# Altium PCB som_fpga.PcbDoc (part 1 of 2)
Units mil, origin at the board's own origin, x right, y up, seen from the top; angles counter-clockwise.
Board outline 2362.2 x 1968.5 mil, 4 copper layers (F.Cu, In1.Cu, In2.Cu, B.Cu); 88 components, 289 nets, 794 pads, 250 vias.
Unrouted connection lines stored in the file: 96.
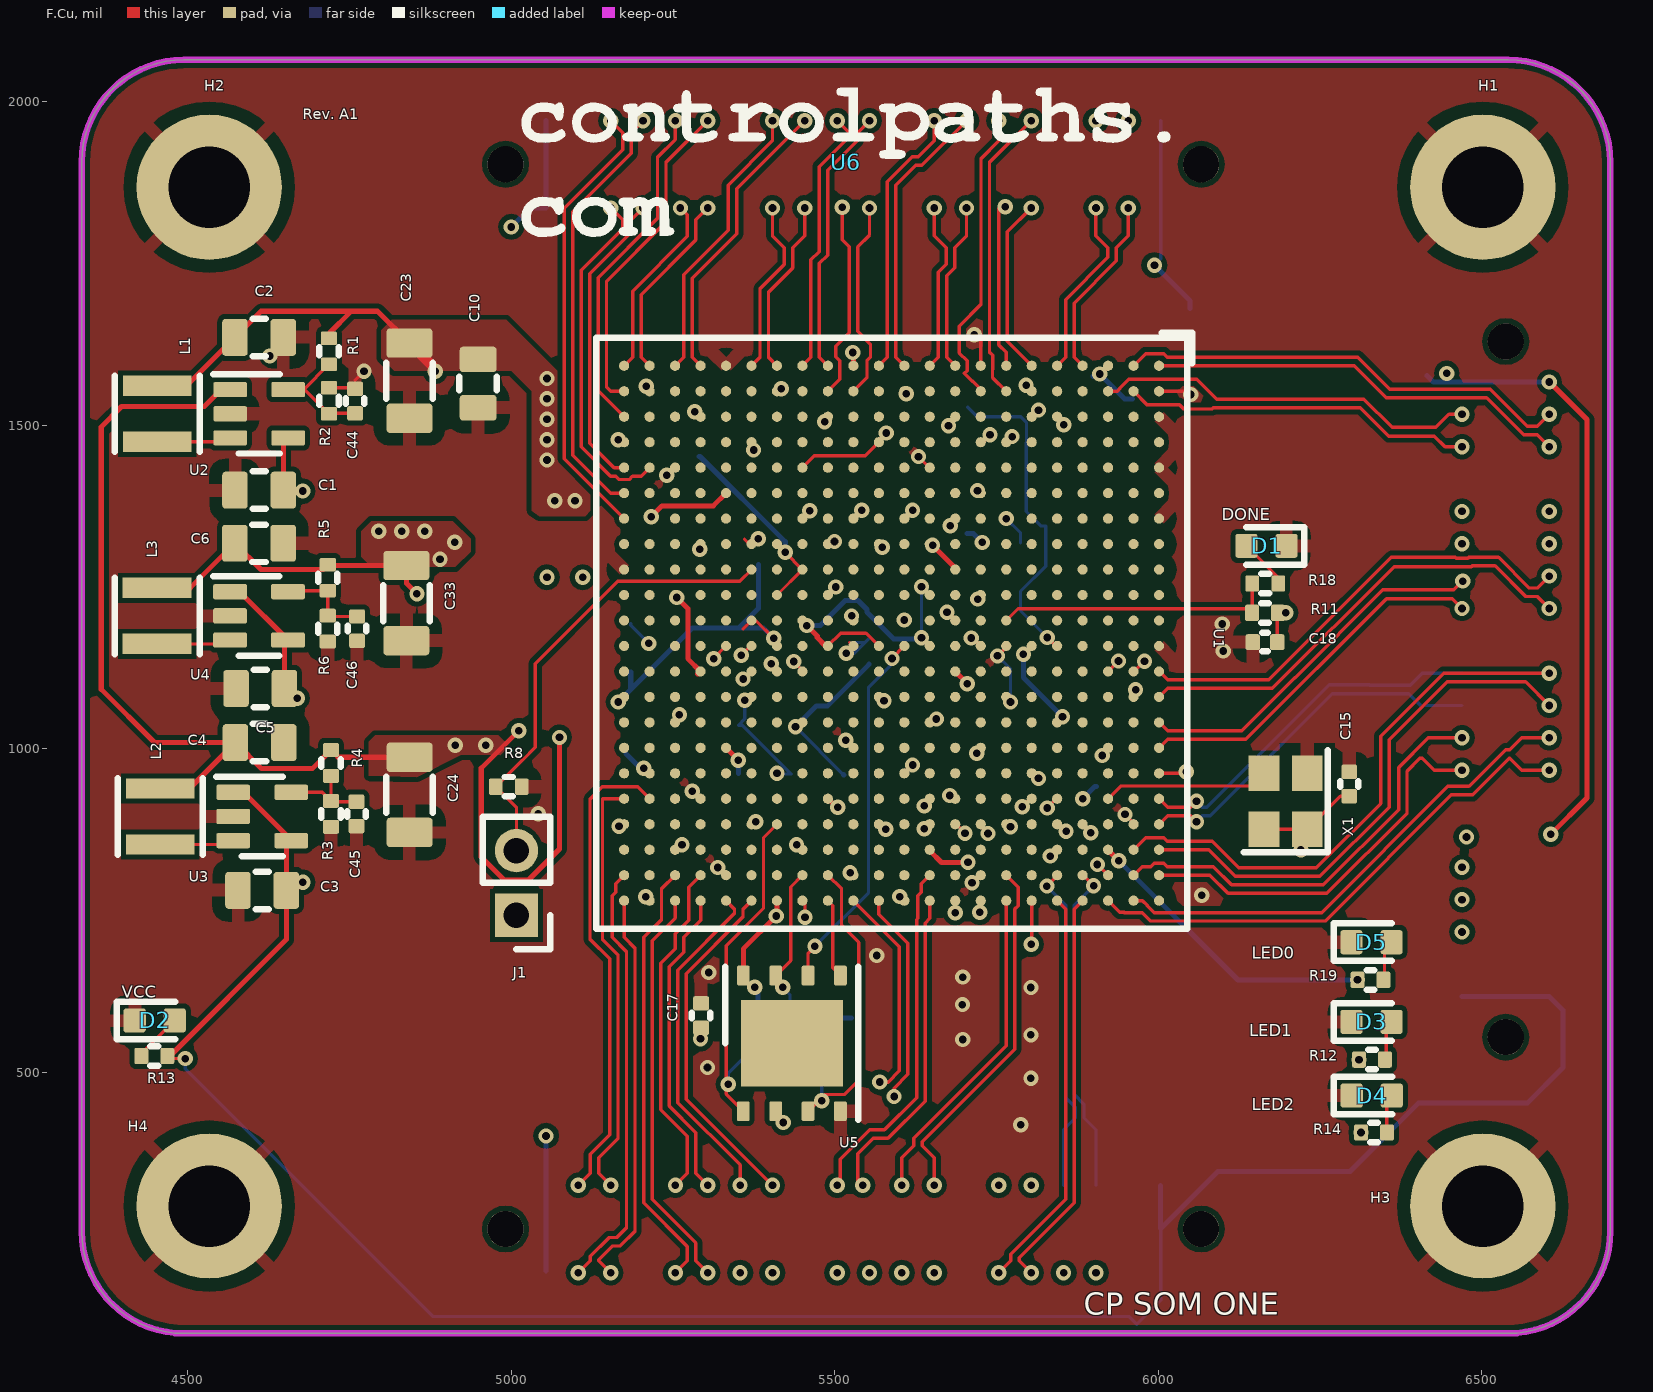
[diagram p0: F.Cu view]
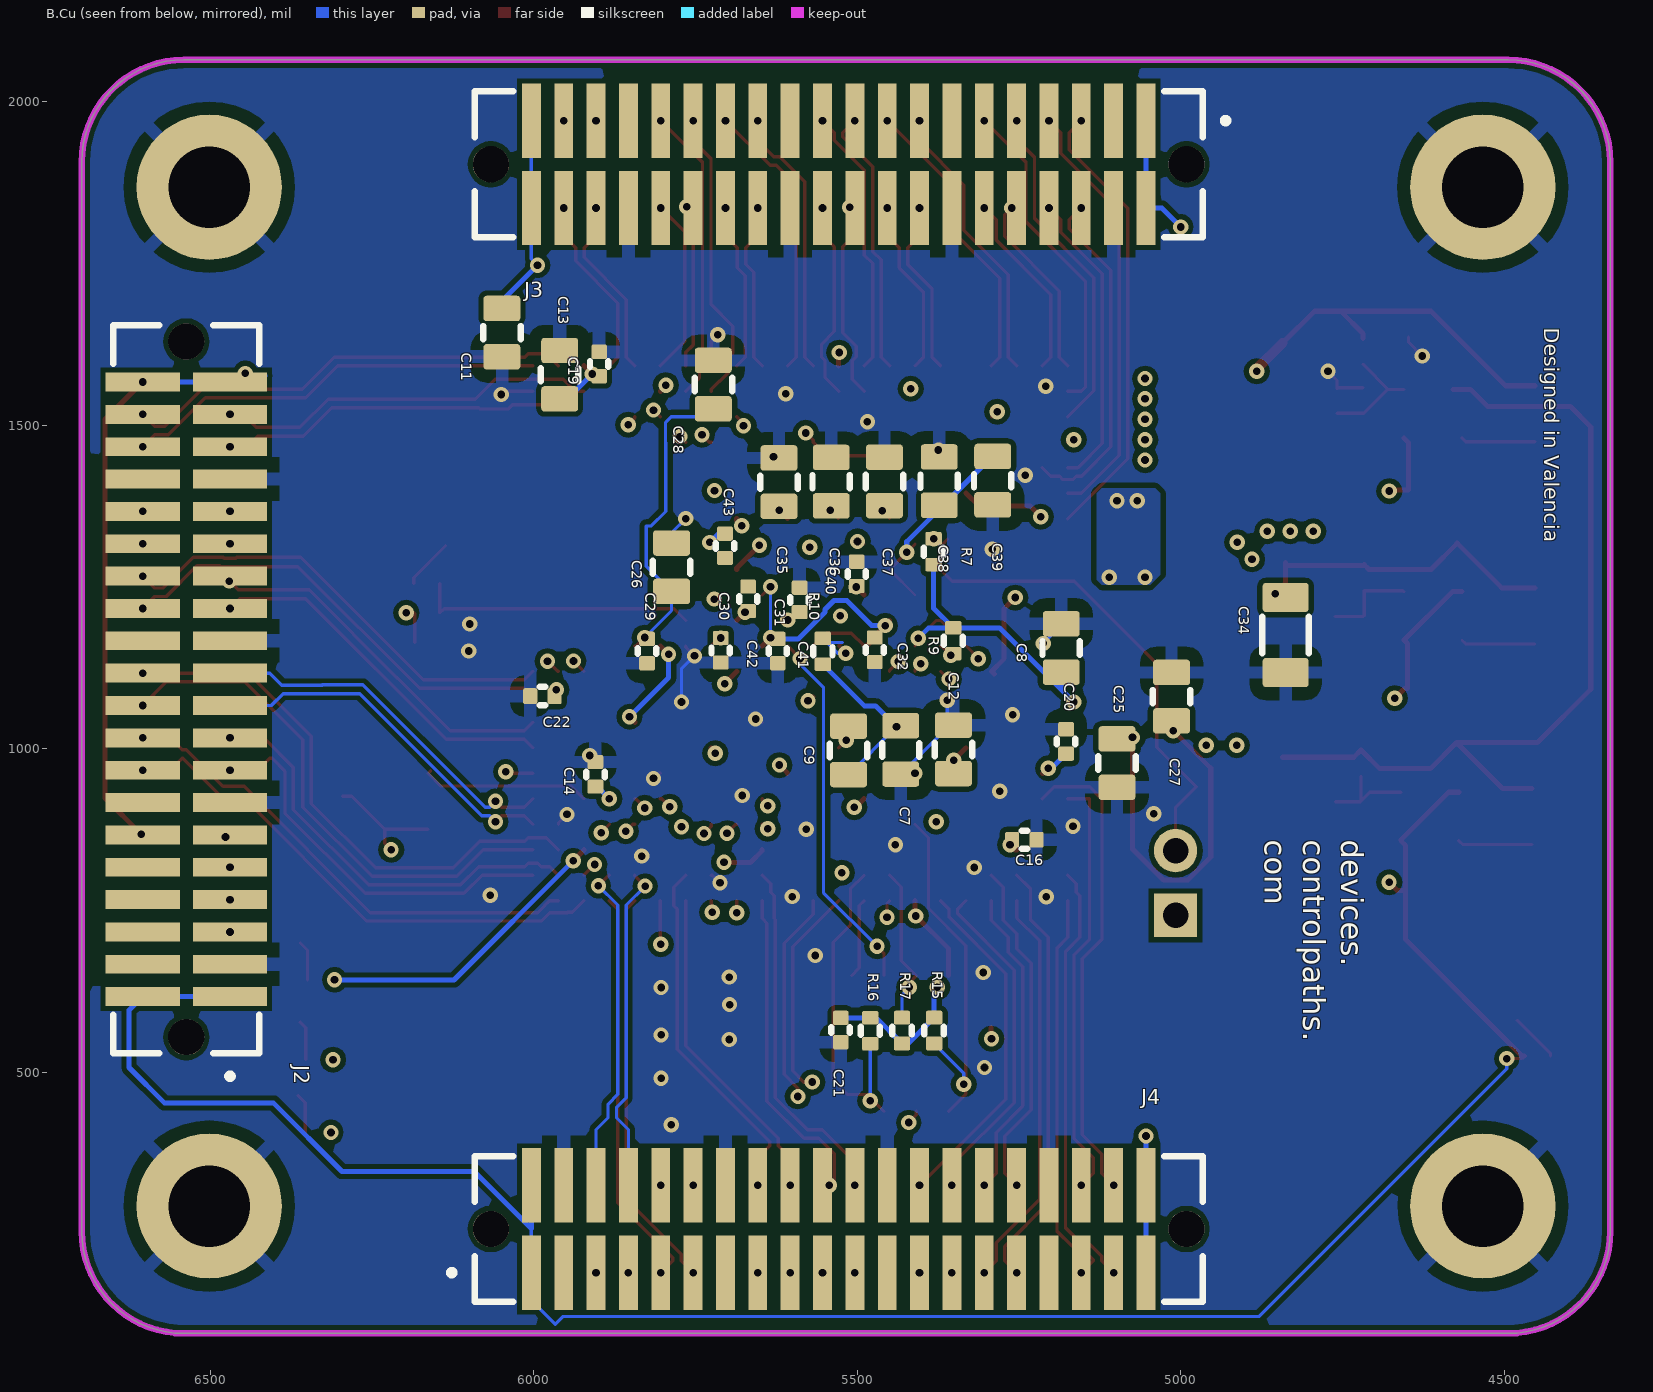
[diagram p1: B.Cu view, seen from below]
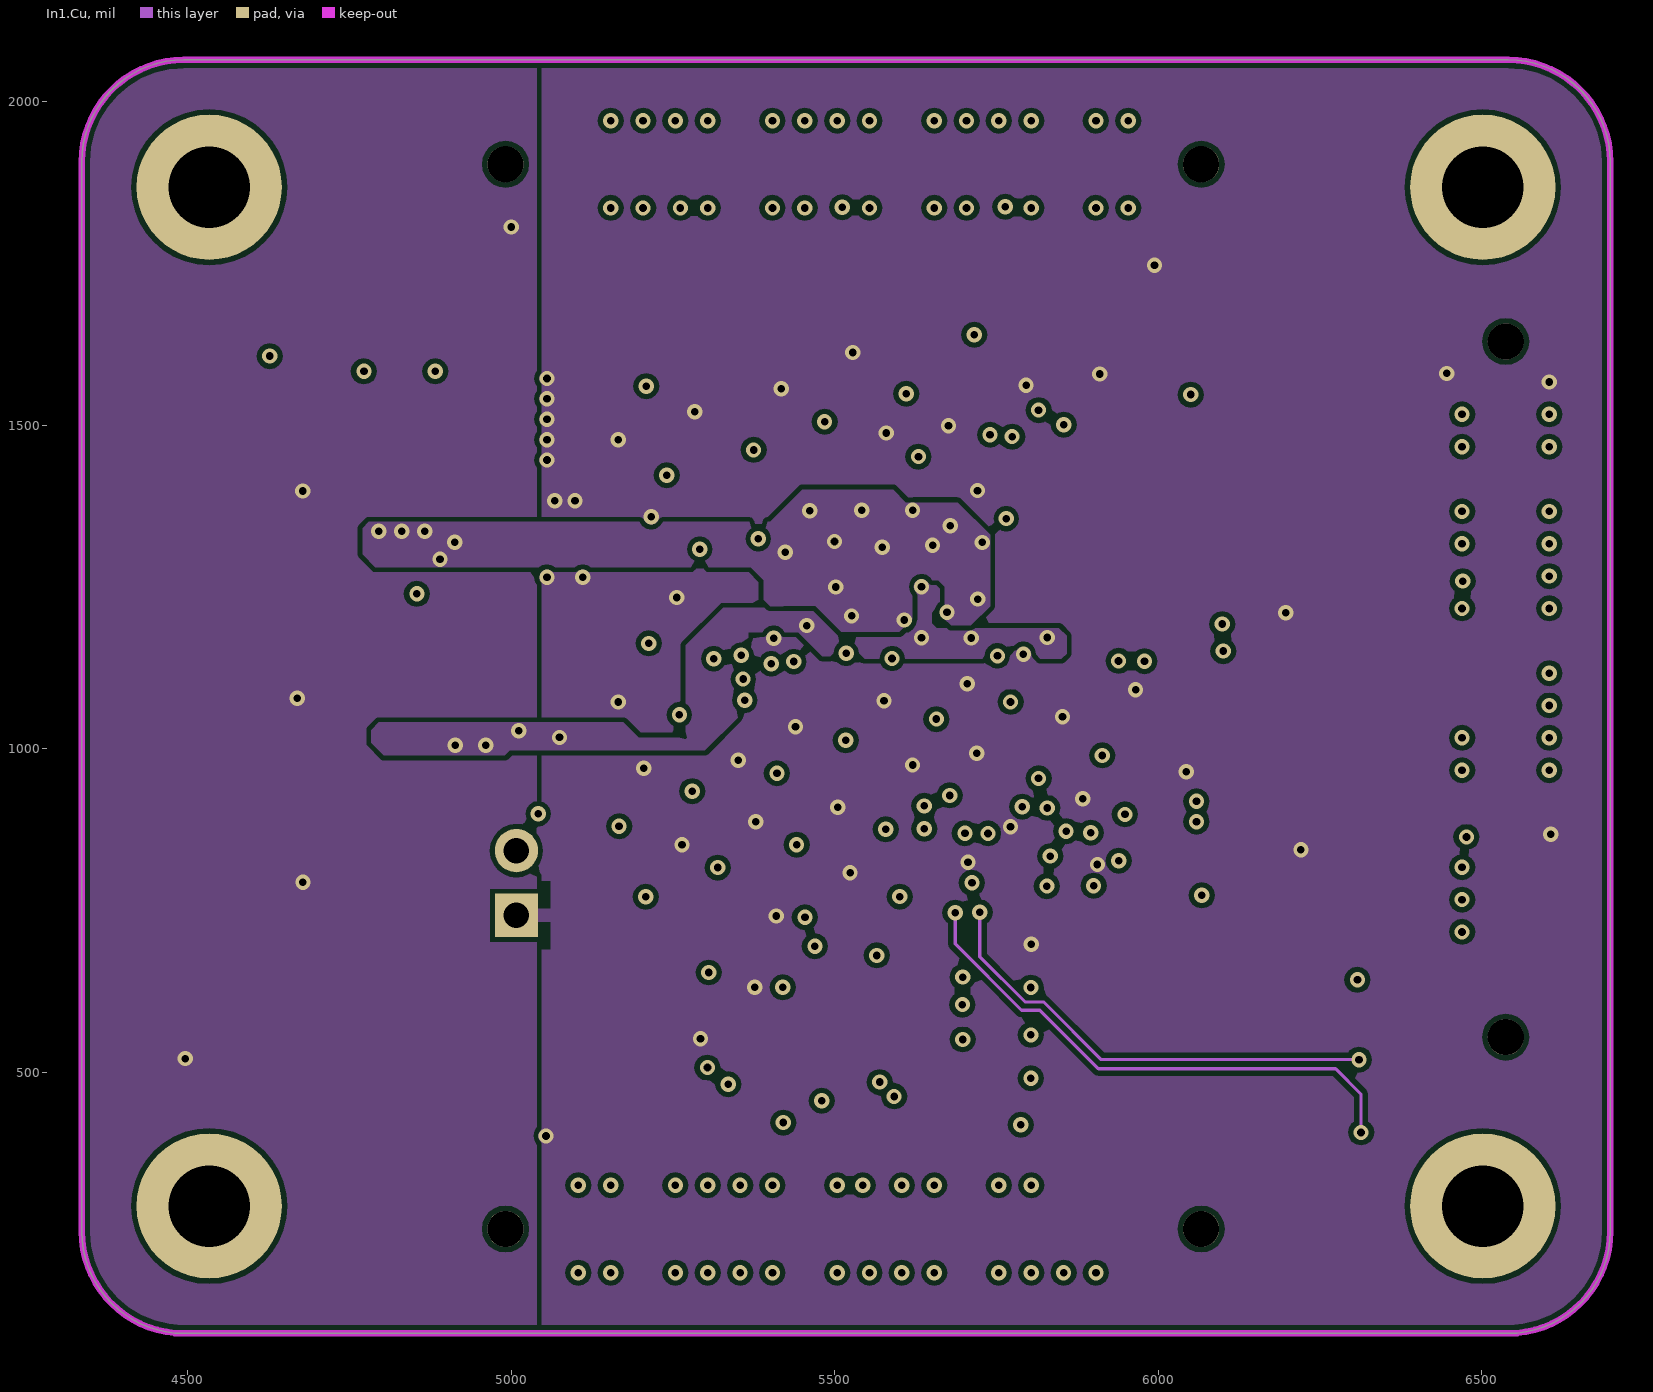
[diagram p2: In1.Cu]
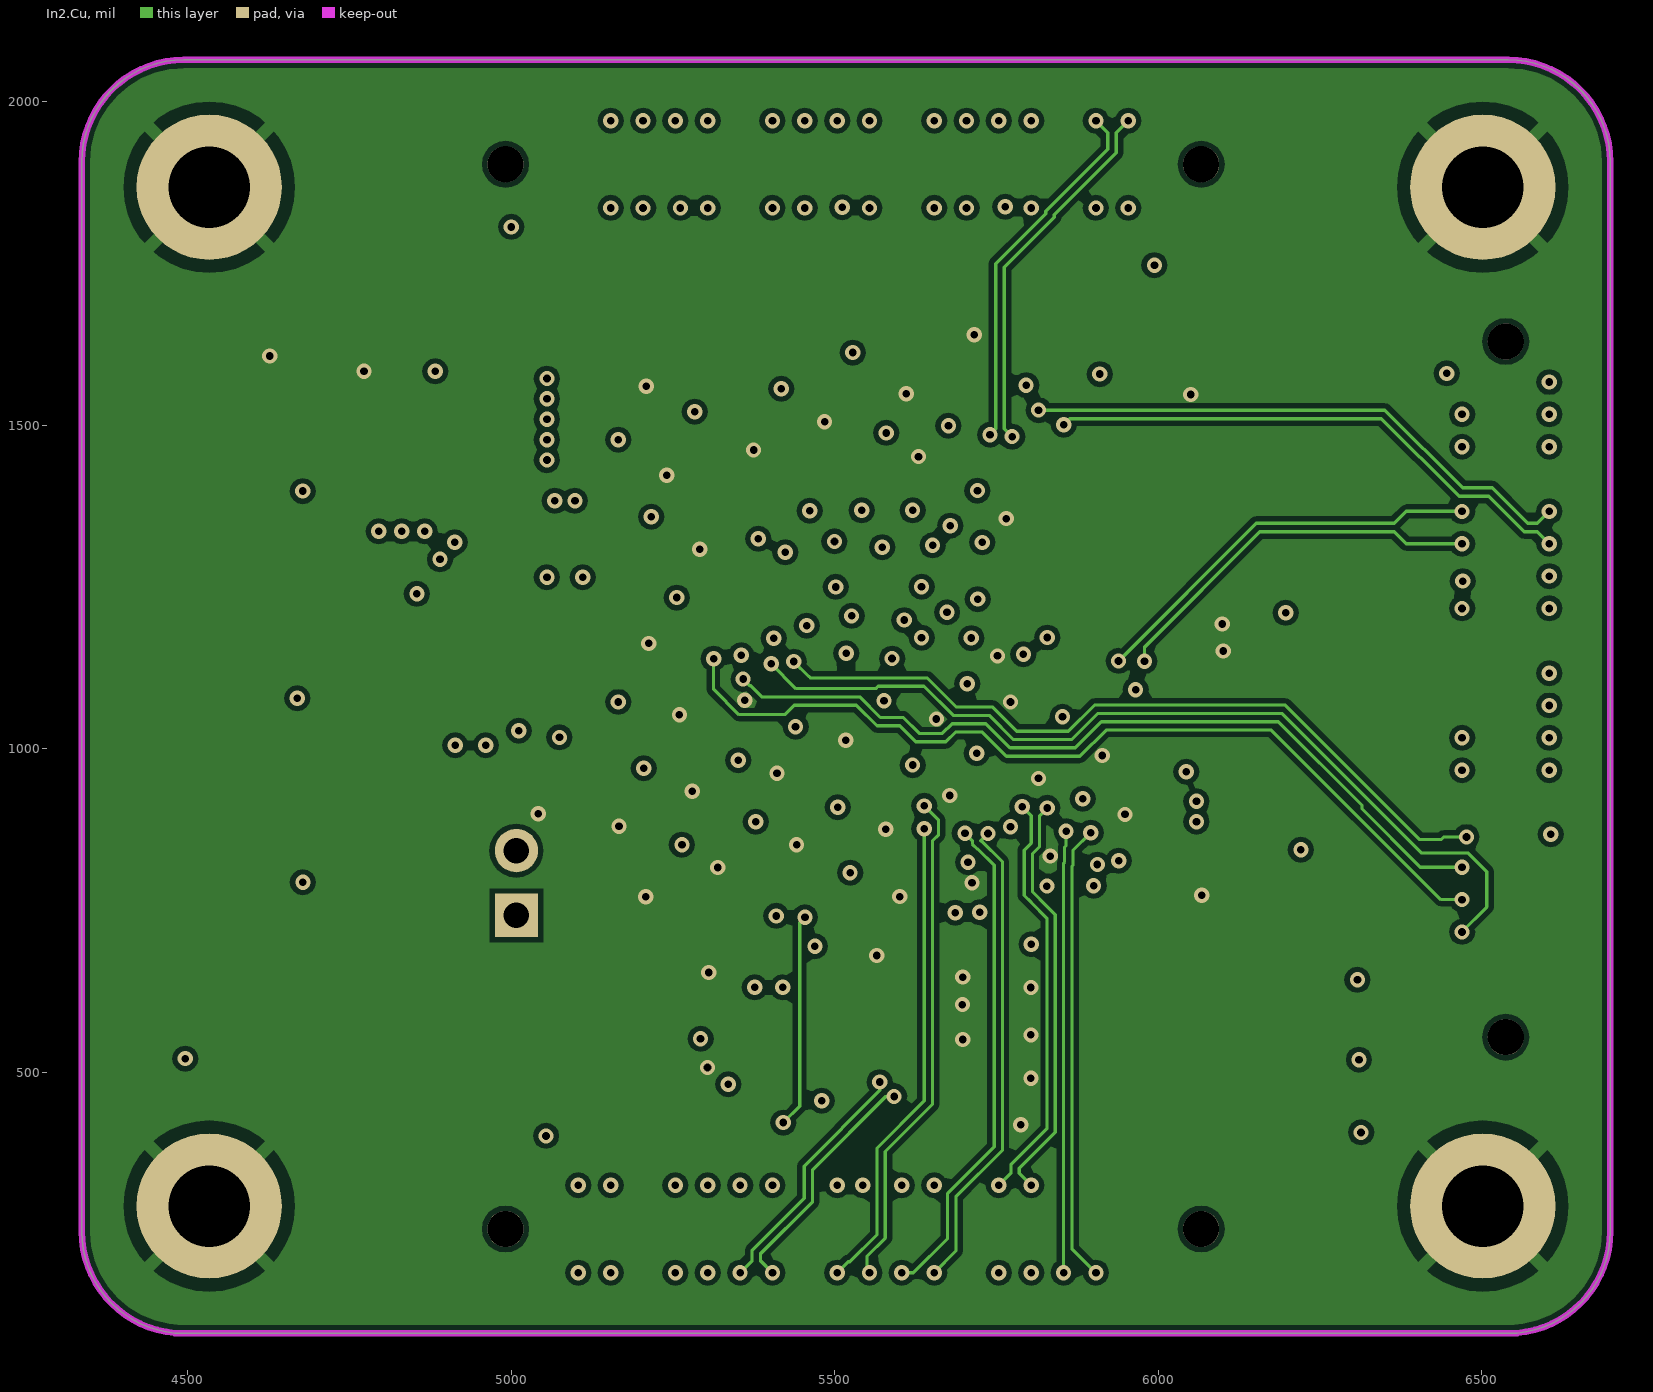
[diagram p3: In2.Cu]

## Layer stack, top to bottom
F.Mask: solder mask 0.4, Solder Resist, Dk 3.5
F.Cu: signal copper 1.4
Dielectric 1: dielectric 12.6, FR-4, Dk 4.8
In1.Cu: signal copper 1.4
Dielectric2: dielectric 12.6, FR-4, Dk 4.8
In2.Cu: signal copper 1.4
Dielectric3: dielectric 12.6, FR-4, Dk 4.8
B.Cu: signal copper 1.4
B.Mask: solder mask 0.4, Solder Resist, Dk 3.5

## Board outline
6698.43,1907.09 6698.43,253.54 cw(c6540.94,253.54) 6540.94,96.06 4493.7,96.06 cw(c4493.7,253.54) 4336.22,253.54 4336.22,1907.09 cw(c4493.7,1907.09) 6540.94,2064.57 cw(c6540.94,1907.09) 6698.43,1907.09

## Design rules (kind name [scope] priority, off if disabled: settings)
Clearance "Clearence 0.3_Polygon" [InNamedPolygon('In1.Cu-+3V3-1')] p1: gap=11.81 ignorepadtopadclearanceinfootprint=FALSE
Clearance "Clearence 0.2_Polygon" [InNamedPolygon('F.Cu-+1V8') OR InNamedPolygon('F.Cu-+3V3') OR InNamedPolygon('F.Cu-+1V0') OR InNamedPolygon('F.Cu-GND') OR InNamedPolygon('In1.Cu-+3V3') OR InNamedPolygon('In1.Cu-+1V8') OR InNamedPolygon('In1.Cu-+5V') OR InNamedPolygon('In1.Cu-+1V0') OR InNamedPolygon('In2.Cu-GND') OR InNamedPolygon('B.Cu-+3V3') OR InNamedPolygon('B.Cu-GND')] p2: gap=7.87 ignorepadtopadclearanceinfootprint=FALSE
MinimumSolderMaskSliver [All] p1: minsoldermaskwidth=0
PolygonConnect Polygon_B.Cu-GND_ConnectDirect [IsNamedPolygon('B.Cu-GND') vs IsVia] p1: connectstyle=Direct reliefconductorwidth=10 reliefentries=4 polygonreliefangle="90 Angle" airgapwidth=10
PolygonConnect Polygon_B.Cu-GND_ConnectRelief45 [IsNamedPolygon('B.Cu-GND') vs (IsThruPin or IsSMTPin) and (PadShape_AllLayers = 'Round')] p2: connectstyle=Relief reliefconductorwidth=19.68 reliefentries=4 polygonreliefangle="45 Angle" airgapwidth=19.68
PolygonConnect Polygon_B.Cu-GND_ConnectRelief90 [IsNamedPolygon('B.Cu-GND') vs (IsThruPin or IsSMTPin) and (PadShape_AllLayers <> 'Round')] p3: connectstyle=Relief reliefconductorwidth=19.68 reliefentries=4 polygonreliefangle="90 Angle" airgapwidth=19.68
PolygonConnect Polygon_B.Cu-+3V3_ConnectDirect [IsNamedPolygon('B.Cu-+3V3') vs IsVia] p4: connectstyle=Direct reliefconductorwidth=10 reliefentries=4 polygonreliefangle="90 Angle" airgapwidth=10
PolygonConnect Polygon_B.Cu-+3V3_ConnectRelief45 [IsNamedPolygon('B.Cu-+3V3') vs (IsThruPin or IsSMTPin) and (PadShape_AllLayers = 'Round')] p5: connectstyle=Relief reliefconductorwidth=19.68 reliefentries=4 polygonreliefangle="45 Angle" airgapwidth=19.68
PolygonConnect Polygon_B.Cu-+3V3_ConnectRelief90 [IsNamedPolygon('B.Cu-+3V3') vs (IsThruPin or IsSMTPin) and (PadShape_AllLayers <> 'Round')] p6: connectstyle=Relief reliefconductorwidth=19.68 reliefentries=4 polygonreliefangle="90 Angle" airgapwidth=19.68
PolygonConnect Polygon_In2.Cu-GND_ConnectDirect [IsNamedPolygon('In2.Cu-GND') vs IsVia] p7: connectstyle=Direct reliefconductorwidth=10 reliefentries=4 polygonreliefangle="90 Angle" airgapwidth=10
PolygonConnect Polygon_In2.Cu-GND_ConnectRelief45 [IsNamedPolygon('In2.Cu-GND') vs (IsThruPin or IsSMTPin) and (PadShape_AllLayers = 'Round')] p8: connectstyle=Relief reliefconductorwidth=19.68 reliefentries=4 polygonreliefangle="45 Angle" airgapwidth=19.68
PolygonConnect Polygon_In2.Cu-GND_ConnectRelief90 [IsNamedPolygon('In2.Cu-GND') vs (IsThruPin or IsSMTPin) and (PadShape_AllLayers <> 'Round')] p9: connectstyle=Relief reliefconductorwidth=19.68 reliefentries=4 polygonreliefangle="90 Angle" airgapwidth=19.68
PolygonConnect Polygon_In1.Cu-+1V0_ConnectDirect [IsNamedPolygon('In1.Cu-+1V0') vs IsVia] p10: connectstyle=Direct reliefconductorwidth=10 reliefentries=4 polygonreliefangle="90 Angle" airgapwidth=10
PolygonConnect Polygon_In1.Cu-+1V0_ConnectRelief45 [IsNamedPolygon('In1.Cu-+1V0') vs (IsThruPin or IsSMTPin) and (PadShape_AllLayers = 'Round')] p11: connectstyle=Relief reliefconductorwidth=19.68 reliefentries=4 polygonreliefangle="45 Angle" airgapwidth=19.68
PolygonConnect Polygon_In1.Cu-+1V0_ConnectRelief90 [IsNamedPolygon('In1.Cu-+1V0') vs (IsThruPin or IsSMTPin) and (PadShape_AllLayers <> 'Round')] p12: connectstyle=Relief reliefconductorwidth=19.68 reliefentries=4 polygonreliefangle="90 Angle" airgapwidth=19.68
PolygonConnect Polygon_In1.Cu-+5V_ConnectDirect [IsNamedPolygon('In1.Cu-+5V') vs IsVia] p13: connectstyle=Direct reliefconductorwidth=10 reliefentries=4 polygonreliefangle="90 Angle" airgapwidth=10
PolygonConnect Polygon_In1.Cu-+5V_ConnectRelief45 [IsNamedPolygon('In1.Cu-+5V') vs (IsThruPin or IsSMTPin) and (PadShape_AllLayers = 'Round')] p14: connectstyle=Relief reliefconductorwidth=19.68 reliefentries=4 polygonreliefangle="45 Angle" airgapwidth=19.68
PolygonConnect Polygon_In1.Cu-+5V_ConnectRelief90 [IsNamedPolygon('In1.Cu-+5V') vs (IsThruPin or IsSMTPin) and (PadShape_AllLayers <> 'Round')] p15: connectstyle=Relief reliefconductorwidth=19.68 reliefentries=4 polygonreliefangle="90 Angle" airgapwidth=19.68
PolygonConnect Polygon_In1.Cu-+3V3-1_ConnectDirect [IsNamedPolygon('In1.Cu-+3V3-1') vs IsVia] p16: connectstyle=Direct reliefconductorwidth=10 reliefentries=4 polygonreliefangle="90 Angle" airgapwidth=10
PolygonConnect Polygon_In1.Cu-+3V3-1_ConnectRelief45 [IsNamedPolygon('In1.Cu-+3V3-1') vs (IsThruPin or IsSMTPin) and (PadShape_AllLayers = 'Round')] p17: connectstyle=Relief reliefconductorwidth=19.68 reliefentries=4 polygonreliefangle="45 Angle" airgapwidth=19.68
PolygonConnect Polygon_In1.Cu-+3V3-1_ConnectRelief90 [IsNamedPolygon('In1.Cu-+3V3-1') vs (IsThruPin or IsSMTPin) and (PadShape_AllLayers <> 'Round')] p18: connectstyle=Relief reliefconductorwidth=19.68 reliefentries=4 polygonreliefangle="90 Angle" airgapwidth=19.68
PolygonConnect Polygon_In1.Cu-+1V8_ConnectDirect [IsNamedPolygon('In1.Cu-+1V8') vs IsVia] p19: connectstyle=Direct reliefconductorwidth=10 reliefentries=4 polygonreliefangle="90 Angle" airgapwidth=10
PolygonConnect Polygon_In1.Cu-+1V8_ConnectRelief45 [IsNamedPolygon('In1.Cu-+1V8') vs (IsThruPin or IsSMTPin) and (PadShape_AllLayers = 'Round')] p20: connectstyle=Relief reliefconductorwidth=19.68 reliefentries=4 polygonreliefangle="45 Angle" airgapwidth=19.68
PolygonConnect Polygon_In1.Cu-+1V8_ConnectRelief90 [IsNamedPolygon('In1.Cu-+1V8') vs (IsThruPin or IsSMTPin) and (PadShape_AllLayers <> 'Round')] p21: connectstyle=Relief reliefconductorwidth=19.68 reliefentries=4 polygonreliefangle="90 Angle" airgapwidth=19.68
PolygonConnect Polygon_In1.Cu-+3V3_ConnectDirect [IsNamedPolygon('In1.Cu-+3V3') vs IsVia] p22: connectstyle=Direct reliefconductorwidth=10 reliefentries=4 polygonreliefangle="90 Angle" airgapwidth=10
PolygonConnect Polygon_In1.Cu-+3V3_ConnectRelief45 [IsNamedPolygon('In1.Cu-+3V3') vs (IsThruPin or IsSMTPin) and (PadShape_AllLayers = 'Round')] p23: connectstyle=Relief reliefconductorwidth=19.68 reliefentries=4 polygonreliefangle="45 Angle" airgapwidth=19.68
PolygonConnect Polygon_In1.Cu-+3V3_ConnectRelief90 [IsNamedPolygon('In1.Cu-+3V3') vs (IsThruPin or IsSMTPin) and (PadShape_AllLayers <> 'Round')] p24: connectstyle=Relief reliefconductorwidth=19.68 reliefentries=4 polygonreliefangle="90 Angle" airgapwidth=19.68
PolygonConnect Polygon_F.Cu-GND_ConnectDirect [IsNamedPolygon('F.Cu-GND') vs IsVia] p25: connectstyle=Direct reliefconductorwidth=10 reliefentries=4 polygonreliefangle="90 Angle" airgapwidth=10
PolygonConnect Polygon_F.Cu-GND_ConnectRelief45 [IsNamedPolygon('F.Cu-GND') vs (IsThruPin or IsSMTPin) and (PadShape_AllLayers = 'Round')] p26: connectstyle=Relief reliefconductorwidth=19.68 reliefentries=4 polygonreliefangle="45 Angle" airgapwidth=19.68
PolygonConnect Polygon_F.Cu-GND_ConnectRelief90 [IsNamedPolygon('F.Cu-GND') vs (IsThruPin or IsSMTPin) and (PadShape_AllLayers <> 'Round')] p27: connectstyle=Relief reliefconductorwidth=19.68 reliefentries=4 polygonreliefangle="90 Angle" airgapwidth=19.68
PolygonConnect Polygon_F.Cu-+1V0_ConnectDirect [IsNamedPolygon('F.Cu-+1V0') vs IsVia] p28: connectstyle=Direct reliefconductorwidth=10 reliefentries=4 polygonreliefangle="90 Angle" airgapwidth=10
PolygonConnect Polygon_F.Cu-+1V0_ConnectRelief45 [IsNamedPolygon('F.Cu-+1V0') vs (IsThruPin or IsSMTPin) and (PadShape_AllLayers = 'Round')] p29: connectstyle=Relief reliefconductorwidth=19.68 reliefentries=4 polygonreliefangle="45 Angle" airgapwidth=19.68
PolygonConnect Polygon_F.Cu-+1V0_ConnectRelief90 [IsNamedPolygon('F.Cu-+1V0') vs (IsThruPin or IsSMTPin) and (PadShape_AllLayers <> 'Round')] p30: connectstyle=Relief reliefconductorwidth=19.68 reliefentries=4 polygonreliefangle="90 Angle" airgapwidth=19.68
PolygonConnect Polygon_F.Cu-+3V3_ConnectDirect [IsNamedPolygon('F.Cu-+3V3') vs IsVia] p31: connectstyle=Direct reliefconductorwidth=10 reliefentries=4 polygonreliefangle="90 Angle" airgapwidth=10
PolygonConnect Polygon_F.Cu-+3V3_ConnectRelief45 [IsNamedPolygon('F.Cu-+3V3') vs (IsThruPin or IsSMTPin) and (PadShape_AllLayers = 'Round')] p32: connectstyle=Relief reliefconductorwidth=19.68 reliefentries=4 polygonreliefangle="45 Angle" airgapwidth=19.68
PolygonConnect Polygon_F.Cu-+3V3_ConnectRelief90 [IsNamedPolygon('F.Cu-+3V3') vs (IsThruPin or IsSMTPin) and (PadShape_AllLayers <> 'Round')] p33: connectstyle=Relief reliefconductorwidth=19.68 reliefentries=4 polygonreliefangle="90 Angle" airgapwidth=19.68
PolygonConnect Polygon_F.Cu-+1V8_ConnectDirect [IsNamedPolygon('F.Cu-+1V8') vs IsVia] p34: connectstyle=Direct reliefconductorwidth=10 reliefentries=4 polygonreliefangle="90 Angle" airgapwidth=10
PolygonConnect Polygon_F.Cu-+1V8_ConnectRelief45 [IsNamedPolygon('F.Cu-+1V8') vs (IsThruPin or IsSMTPin) and (PadShape_AllLayers = 'Round')] p35: connectstyle=Relief reliefconductorwidth=19.68 reliefentries=4 polygonreliefangle="45 Angle" airgapwidth=19.68
PolygonConnect Polygon_F.Cu-+1V8_ConnectRelief90 [IsNamedPolygon('F.Cu-+1V8') vs (IsThruPin or IsSMTPin) and (PadShape_AllLayers <> 'Round')] p36: connectstyle=Relief reliefconductorwidth=19.68 reliefentries=4 polygonreliefangle="90 Angle" airgapwidth=19.68
RoutingVias [All] p1: holewidth=28 width=50 viastyle="Through Hole" minholewidth=28 minwidth=50 maxholewidth=28 maxwidth=50
SilkToSilkClearance [All] p1: silktosilkclearance=0
SilkToSolderMaskClearance [IsPad] p1: minsilkscreentomaskgap=0 clearancetoexposedcopper=TRUE
SolderMaskExpansion [All] p1: expansion=4 istentingtop=FALSE
Width [All] p1: maxlimit=393.7 minlimit=10 preferedwidth=10 minimp=50.000000 maximp=50.000000 favimp=50.000000
27 further rules are at their usual default settings.

## Components (designator, comment, footprint, x,y, rotation, side; value= is the part's Value field where it differs from the comment)
C1 "4u7" C_0805_2012Metric#1 4610.3,1399.45 r180 top
C2 "10u" C_0805_2012Metric#1 4610.3,1635.67 r0 top
C3 "4u7" C_0805_2012Metric#1 4614.92,780.94 r180 top
C4 "10u" C_0805_2012Metric#1 4610.98,1009.29 r0 top
C5 "4u7" C_0805_2012Metric#1 4611.97,1092.95 r180 top
C6 "10u" C_0805_2012Metric#1 4610,1317.36 r0 top
C7 "4u7" C_0805_2012Metric#2 5432.68,998.03 r90 bottom
C8 "4u7" C_0805_2012Metric#2 5184.65,1155.51 r270 bottom
C9 "4u7" C_0805_2012Metric#2 5513.39,997.24 r270 bottom
C10 "4u7" C_0805_2012Metric#1 4948.82,1564.17 r270 top
C11 "4u7" C_0805_2012Metric#2 6049.21,1642.91 r90 bottom
C12 "4u7" C_0805_2012Metric#2 5351.18,998.82 r270 bottom
C13 "4u7" C_0805_2012Metric#2 5959.84,1577.95 r270 bottom
C14 "0.47u" C_0402_1005Metric#1 5904.72,960.24 r270 bottom
C15 "0.47u" C_0402_1005Metric#2 6295.28,945.28 r90 top
C16 "0.47u" C_0402_1005Metric#1 5241.73,859.06 r0 bottom
C17 "0.47u" C_0402_1005Metric#2 5293.31,587.4 r90 top
C18 "0.47u" C_0402_1005Metric#2 6164.96,1164.57 r180 top
C19 "0.47u" C_0402_1005Metric#1 5898.82,1594.49 r270 bottom
C20 "0.47u" C_0402_1005Metric#1 5177.17,1011.02 r270 bottom
C21 "0.47u" C_0402_1005Metric#1 5525.59,564.96 r90 bottom
C22 "0.47u" C_0402_1005Metric#1 5986.61,1081.1 r180 bottom
C23 "47u" C_1206_3216Metric#1 4842.58,1568.74 r270 top
C24 "47u" C_1206_3216Metric#1 4842.78,928.58 r270 top
C25 "4u7" C_0805_2012Metric#2 5098.43,977.56 r90 bottom
C26 "4u7" C_0805_2012Metric#2 5787.01,1280.32 r270 bottom
C27 "4u7" C_0805_2012Metric#2 5014.17,1080.32 r270 bottom
C28 "4u7" C_0805_2012Metric#2 5722.44,1562.6 r270 bottom
C29 "0.47u" C_0402_1005Metric#1 5824.8,1150.79 r90 bottom
C30 "0.47u" C_0402_1005Metric#1 5711.02,1151.97 r90 bottom
C31 "0.47u" C_0402_1005Metric#1 5622.83,1150.79 r90 bottom
C32 "0.47u" C_0402_1005Metric#1 5472.83,1152.76 r90 bottom
C33 "100u" C_1206_3216Metric#1 4837.85,1224.84 r270 top
C34 "100u" C_1206_3216Metric#2 4837.8,1175.59 r90 bottom
C35 "4u7" C_0805_2012Metric#2 5620.87,1411.81 r270 bottom
C36 "4u7" C_0805_2012Metric#2 5540.16,1412.6 r270 bottom
C37 "4u7" C_0805_2012Metric#2 5457.87,1412.99 r270 bottom
C38 "4u7" C_0805_2012Metric#2 5373.23,1413.39 r270 bottom
C39 "4u7" C_0805_2012Metric#2 5290.55,1414.17 r90 bottom
C40 "0.47u" C_0402_1005Metric#1 5500.79,1270.08 r270 bottom
C41 "0.47u" C_0402_1005Metric#1 5588.98,1229.92 r270 bottom
C42 "0.47u" C_0402_1005Metric#1 5668.5,1231.5 r270 bottom
C43 "0.47u" C_0402_1005Metric#1 5704.33,1313.39 r90 bottom
C44 "0.47u" C_0402_1005Metric#2 4758.43,1537.24 r90 top
C45 "0.47u" C_0402_1005Metric#2 4760.59,899.06 r270 top
C46 "0.47u" C_0402_1005Metric#2 4761.57,1185.47 r270 top
D1 "DONE" LED_0603_1608Metric 6167.32,1313.39 r180 top
D2 "VCC" LED_0603_1608Metric 4448.82,579.92 r0 top
D3 "USER_LED" LED_0603_1608Metric 6329.53,577.56 r0 top
D4 "USER_LED" LED_0603_1608Metric 6329.92,463.78 r0 top
D5 "USER_LED" LED_0603_1608Metric 6329.53,700.79 r0 top
H1 "MountingHole_Pad" MountingHole_3.2mm_M3_ISO7380_Pad 6501.57,1867.72 r0 top
H2 "MountingHole_Pad" MountingHole_3.2mm_M3_ISO7380_Pad 4533.07,1867.72 r0 top
H3 "MountingHole_Pad" MountingHole_3.2mm_M3_ISO7380_Pad 6501.57,292.91 r0 top
H4 "MountingHole_Pad" MountingHole_3.2mm_M3_ISO7380_Pad 4533.07,292.91 r0 top
J1 "Conn_01x02_Pin" PinHeader_1x02_P2.54mm_Vertical 5007.87,742.32 r180 top
J2 "Conn_02x20_Odd_Even" SAMTEC_TFM-120-02-S-D-A 6537.01,1091.63 r270 bottom
J3 "Conn_02x20_Odd_Even" SAMTEC_TFM-120-02-S-D-A 5528.64,1903.15 r180 bottom
J4 "Conn_02x20_Odd_Even" SAMTEC_TFM-120-02-S-D-A 5528.64,257.48 r0 bottom
L1 "2u2" IND_LQH3NPN2R2MJRL 4452.81,1517.56 r90 top
L2 "2u2" IND_LQH3NPN2R2MJRL 4457.44,895.12 r90 top
L3 "2u2" IND_LQH3NPN2R2MJRL 4452.52,1205.16 r90 top
R1 "100k" R_0402_1005Metric#1 4718.07,1614.02 r270 top
R2 "22k" R_0402_1005Metric#1 4718.07,1537.64 r90 top
R3 "120k" R_0402_1005Metric#1 4721.22,899.06 r270 top
R4 "240k" R_0402_1005Metric#1 4721.22,977.8 r270 top
R5 "22k" R_0402_1005Metric#1 4716.3,1264.21 r270 top
R6 "33k" R_0402_1005Metric#1 4716.3,1185.47 r270 top
R7 "4k7" R_0402_1005Metric#2 5381.89,1304.33 r90 bottom
R8 "4k7" R_0402_1005Metric#1 4996.06,941.14 r0 top
R9 "4k7" R_0402_1005Metric#2 5351.57,1166.54 r270 bottom
R10 "4k7" R_0402_1005Metric#2 5553.15,1150.39 r90 bottom
R11 "330" R_0402_1005Metric#1 6164.96,1209.84 r0 top
R12 "10k" R_0402_1005Metric#1 6330.31,519.29 r0 top
R13 "10k" R_0402_1005Metric#1 4448.33,524.8 r180 top
R14 "10k" R_0402_1005Metric#1 6333.46,406.69 r0 top
R15 "4k7" R_0402_1005Metric#2 5381.1,564.17 r90 bottom
R16 "4k7" R_0402_1005Metric#2 5479.92,563.78 r90 bottom
R17 "4k7" R_0402_1005Metric#2 5430.71,564.17 r270 bottom
R18 "100" R_0402_1005Metric#1 6165.35,1255.12 r180 top
R19 "10k" R_0402_1005Metric#1 6327.95,642.52 r0 top
U1 "XC7A35T-FGG484" FB-BGA-484_23.0x23.0mm_Layout22x22_P1.0mm 5587.8,1178.35 r270 top
U2 "TLV62565DBVR" SOT-23-5 4610.3,1517.56 r0 top
U3 "TLV62565DBVR" SOT-23-5 4614.92,895.12 r0 top
U4 "TLV62565DBVR" SOT-23-5 4610,1205.16 r0 top
U5 "MX25L12833F" WSON-8-1EP_6x5mm_P1.27mm_EP3.4x4mm 5433.66,544.39 r90 top
U6 "cp_logo25mm" logo25mm 5516.73,1906.69 r0 top
X1 "SG-8018CE" Crystal_SMD_3225-4Pin_3.2x2.5mm 6196.85,918.5 r90 top

## Footprints (in the part's own frame and the unit in brackets; to place one, negate y for a bottom-side part, rotate by r counter-clockwise, add the part's x,y. Pads: shape width x height; smd on the part's side, far side on the other; paste and mask are expansions set on the pad)
C_0402_1005Metric#1 [mm]
  rrect25% 0.56x0.62 smd mask+0: 1(0.48,0) 2(-0.48,0)
  silkscreen extent -0.11,-0.36 0.11,0.36
C_0402_1005Metric#2 [mm]
  rrect25% 0.56x0.62 smd mask+0: 1(-0.48,0) 2(0.48,0)
  silkscreen extent -0.11,-0.36 0.11,0.36
C_0805_2012Metric#1 [mm]
  rrect25% 1x1.45 smd mask+0: 1(-0.95,0) 2(0.95,0)
  silkscreen extent -0.26,-0.73 0.26,0.73
C_0805_2012Metric#2 [mm]
  rrect25% 1x1.45 smd mask+0: 1(0.95,0) 2(-0.95,0)
  silkscreen extent -0.26,-0.73 0.26,0.73
C_1206_3216Metric#1 [mm]
  rrect22% 1.15x1.8 smd mask+0: 1(-1.475,0) 2(1.475,0)
  silkscreen extent -0.71,-0.91 0.71,0.91
C_1206_3216Metric#2 [mm]
  rrect22% 1.15x1.8 smd mask+0: 1(1.475,0) 2(-1.475,0)
  silkscreen extent -0.71,-0.91 0.71,0.91
Crystal_SMD_3225-4Pin_3.2x2.5mm [mm]
  rect 1.4x1.2 smd mask+0: 1(-1.1,-0.85) 2(1.1,-0.85) 3(1.1,0.85) 4(-1.1,0.85)
  silkscreen extent -2,-1.65 2,1.65
FB-BGA-484_23.0x23.0mm_Layout22x22_P1.0mm [mm]
  round 0.4 smd mask+0: A1(-10.5,10.5) A2(-9.5,10.5) A3(-8.5,10.5) A4(-7.5,10.5) A5(-6.5,10.5) A6(-5.5,10.5) A7(-4.5,10.5) A8(-3.5,10.5) A9(-2.5,10.5) A10(-1.5,10.5) A11(-0.5,10.5) A12(0.5,10.5) A13(1.5,10.5) A14(2.5,10.5) A15(3.5,10.5) A16(4.5,10.5) A17(5.5,10.5) A18(6.5,10.5) A19(7.5,10.5) A20(8.5,10.5) A21(9.5,10.5) A22(10.5,10.5) AA1(-10.5,-9.5) AA2(-9.5,-9.5) AA3(-8.5,-9.5) AA4(-7.5,-9.5) AA5(-6.5,-9.5) AA6(-5.5,-9.5) AA7(-4.5,-9.5) AA8(-3.5,-9.5) AA9(-2.5,-9.5) AA10(-1.5,-9.5) AA11(-0.5,-9.5) AA12(0.5,-9.5) AA13(1.5,-9.5) AA14(2.5,-9.5) AA15(3.5,-9.5) AA16(4.5,-9.5) AA17(5.5,-9.5) AA18(6.5,-9.5) AA19(7.5,-9.5) AA20(8.5,-9.5) AA21(9.5,-9.5) AA22(10.5,-9.5) AB1(-10.5,-10.5) AB2(-9.5,-10.5) AB3(-8.5,-10.5) AB4(-7.5,-10.5) AB5(-6.5,-10.5) AB6(-5.5,-10.5) AB7(-4.5,-10.5) AB8(-3.5,-10.5) AB9(-2.5,-10.5) AB10(-1.5,-10.5) AB11(-0.5,-10.5) AB12(0.5,-10.5) AB13(1.5,-10.5) AB14(2.5,-10.5) AB15(3.5,-10.5) AB16(4.5,-10.5) AB17(5.5,-10.5) AB18(6.5,-10.5) AB19(7.5,-10.5) AB20(8.5,-10.5) AB21(9.5,-10.5) AB22(10.5,-10.5) B1(-10.5,9.5) B2(-9.5,9.5) B3(-8.5,9.5) B4(-7.5,9.5) B5(-6.5,9.5) B6(-5.5,9.5) B7(-4.5,9.5) B8(-3.5,9.5) B9(-2.5,9.5) B10(-1.5,9.5) B11(-0.5,9.5) B12(0.5,9.5) B13(1.5,9.5) B14(2.5,9.5) B15(3.5,9.5) B16(4.5,9.5) B17(5.5,9.5) B18(6.5,9.5) B19(7.5,9.5) B20(8.5,9.5) B21(9.5,9.5) B22(10.5,9.5) C1(-10.5,8.5) C2(-9.5,8.5) C3(-8.5,8.5) C4(-7.5,8.5) C5(-6.5,8.5) C6(-5.5,8.5) C7(-4.5,8.5) C8(-3.5,8.5) C9(-2.5,8.5) C10(-1.5,8.5) C11(-0.5,8.5) C12(0.5,8.5) C13(1.5,8.5) C14(2.5,8.5) C15(3.5,8.5) C16(4.5,8.5) C17(5.5,8.5) C18(6.5,8.5) C19(7.5,8.5) C20(8.5,8.5) C21(9.5,8.5) C22(10.5,8.5) D1(-10.5,7.5) D2(-9.5,7.5) D3(-8.5,7.5) D4(-7.5,7.5) D5(-6.5,7.5) D6(-5.5,7.5) D7(-4.5,7.5) D8(-3.5,7.5) D9(-2.5,7.5) D10(-1.5,7.5) D11(-0.5,7.5) D12(0.5,7.5) D13(1.5,7.5) D14(2.5,7.5) D15(3.5,7.5) D16(4.5,7.5) D17(5.5,7.5) D18(6.5,7.5) D19(7.5,7.5) D20(8.5,7.5) D21(9.5,7.5) D22(10.5,7.5) E1(-10.5,6.5) E2(-9.5,6.5) E3(-8.5,6.5) E4(-7.5,6.5) E5(-6.5,6.5) E6(-5.5,6.5) E7(-4.5,6.5) E8(-3.5,6.5) E9(-2.5,6.5) E10(-1.5,6.5) E11(-0.5,6.5) E12(0.5,6.5) E13(1.5,6.5) E14(2.5,6.5) E15(3.5,6.5) E16(4.5,6.5) E17(5.5,6.5) E18(6.5,6.5) E19(7.5,6.5) E20(8.5,6.5) E21(9.5,6.5) E22(10.5,6.5) F1(-10.5,5.5) F2(-9.5,5.5) F3(-8.5,5.5) F4(-7.5,5.5) F5(-6.5,5.5) F6(-5.5,5.5) F7(-4.5,5.5) F8(-3.5,5.5) F9(-2.5,5.5) F10(-1.5,5.5) F11(-0.5,5.5) F12(0.5,5.5) F13(1.5,5.5) F14(2.5,5.5) F15(3.5,5.5) F16(4.5,5.5) F17(5.5,5.5) F18(6.5,5.5) F19(7.5,5.5) F20(8.5,5.5) F21(9.5,5.5) F22(10.5,5.5) G1(-10.5,4.5) G2(-9.5,4.5) G3(-8.5,4.5) G4(-7.5,4.5) G5(-6.5,4.5) G6(-5.5,4.5) G7(-4.5,4.5) G8(-3.5,4.5) G9(-2.5,4.5) G10(-1.5,4.5) G11(-0.5,4.5) G12(0.5,4.5) G13(1.5,4.5) G14(2.5,4.5) G15(3.5,4.5) G16(4.5,4.5) G17(5.5,4.5) G18(6.5,4.5) G19(7.5,4.5) G20(8.5,4.5) G21(9.5,4.5) G22(10.5,4.5) H1(-10.5,3.5) H2(-9.5,3.5) H3(-8.5,3.5) H4(-7.5,3.5) H5(-6.5,3.5) H6(-5.5,3.5) H7(-4.5,3.5) H8(-3.5,3.5) H9(-2.5,3.5) H10(-1.5,3.5) H11(-0.5,3.5) H12(0.5,3.5) H13(1.5,3.5) H14(2.5,3.5) H15(3.5,3.5) H16(4.5,3.5) H17(5.5,3.5) H18(6.5,3.5) H19(7.5,3.5) H20(8.5,3.5) H21(9.5,3.5) H22(10.5,3.5) J1(-10.5,2.5) J2(-9.5,2.5) J3(-8.5,2.5) J4(-7.5,2.5) J5(-6.5,2.5) J6(-5.5,2.5) J7(-4.5,2.5) J8(-3.5,2.5) J9(-2.5,2.5) J10(-1.5,2.5) J11(-0.5,2.5) J12(0.5,2.5) J13(1.5,2.5) J14(2.5,2.5) J15(3.5,2.5) J16(4.5,2.5) J17(5.5,2.5) J18(6.5,2.5) J19(7.5,2.5) J20(8.5,2.5) J21(9.5,2.5) J22(10.5,2.5) K1(-10.5,1.5) K2(-9.5,1.5) K3(-8.5,1.5) K4(-7.5,1.5) K5(-6.5,1.5) K6(-5.5,1.5) K7(-4.5,1.5) K8(-3.5,1.5) K9(-2.5,1.5) K10(-1.5,1.5) K11(-0.5,1.5) K12(0.5,1.5) K13(1.5,1.5) K14(2.5,1.5) K15(3.5,1.5) K16(4.5,1.5) K17(5.5,1.5) K18(6.5,1.5) K19(7.5,1.5) K20(8.5,1.5) K21(9.5,1.5) K22(10.5,1.5) L1(-10.5,0.5) L2(-9.5,0.5) L3(-8.5,0.5) L4(-7.5,0.5) L5(-6.5,0.5) L6(-5.5,0.5) L7(-4.5,0.5) L8(-3.5,0.5) L9(-2.5,0.5) L10(-1.5,0.5) L11(-0.5,0.5) L12(0.5,0.5) L13(1.5,0.5) L14(2.5,0.5) L15(3.5,0.5) L16(4.5,0.5) L17(5.5,0.5) L18(6.5,0.5) L19(7.5,0.5) L20(8.5,0.5) L21(9.5,0.5) L22(10.5,0.5) M1(-10.5,-0.5) M2(-9.5,-0.5) M3(-8.5,-0.5) M4(-7.5,-0.5) M5(-6.5,-0.5) M6(-5.5,-0.5) M7(-4.5,-0.5) M8(-3.5,-0.5) M9(-2.5,-0.5) M10(-1.5,-0.5) M11(-0.5,-0.5) M12(0.5,-0.5) M13(1.5,-0.5) M14(2.5,-0.5) M15(3.5,-0.5) M16(4.5,-0.5) M17(5.5,-0.5) M18(6.5,-0.5) M19(7.5,-0.5) M20(8.5,-0.5) M21(9.5,-0.5) M22(10.5,-0.5) N1(-10.5,-1.5) N2(-9.5,-1.5) N3(-8.5,-1.5) N4(-7.5,-1.5) N5(-6.5,-1.5) N6(-5.5,-1.5) N7(-4.5,-1.5) N8(-3.5,-1.5) N9(-2.5,-1.5) N10(-1.5,-1.5) N11(-0.5,-1.5) N12(0.5,-1.5) N13(1.5,-1.5) N14(2.5,-1.5) N15(3.5,-1.5) N16(4.5,-1.5) N17(5.5,-1.5) N18(6.5,-1.5) N19(7.5,-1.5) N20(8.5,-1.5) N21(9.5,-1.5) N22(10.5,-1.5) P1(-10.5,-2.5) P2(-9.5,-2.5) P3(-8.5,-2.5) P4(-7.5,-2.5) P5(-6.5,-2.5) P6(-5.5,-2.5) P7(-4.5,-2.5) P8(-3.5,-2.5) P9(-2.5,-2.5) P10(-1.5,-2.5) P11(-0.5,-2.5) P12(0.5,-2.5) P13(1.5,-2.5) P14(2.5,-2.5) P15(3.5,-2.5) P16(4.5,-2.5) P17(5.5,-2.5) P18(6.5,-2.5) P19(7.5,-2.5) P20(8.5,-2.5) P21(9.5,-2.5) P22(10.5,-2.5) R1(-10.5,-3.5) R2(-9.5,-3.5) R3(-8.5,-3.5) R4(-7.5,-3.5) R5(-6.5,-3.5) R6(-5.5,-3.5) R7(-4.5,-3.5) R8(-3.5,-3.5) R9(-2.5,-3.5) R10(-1.5,-3.5) R11(-0.5,-3.5) R12(0.5,-3.5) R13(1.5,-3.5) R14(2.5,-3.5) R15(3.5,-3.5) R16(4.5,-3.5) R17(5.5,-3.5) R18(6.5,-3.5) R19(7.5,-3.5) R20(8.5,-3.5) R21(9.5,-3.5) R22(10.5,-3.5) T1(-10.5,-4.5) T2(-9.5,-4.5) T3(-8.5,-4.5) T4(-7.5,-4.5) T5(-6.5,-4.5) T6(-5.5,-4.5) T7(-4.5,-4.5) T8(-3.5,-4.5) T9(-2.5,-4.5) T10(-1.5,-4.5) T11(-0.5,-4.5) T12(0.5,-4.5) T13(1.5,-4.5) T14(2.5,-4.5) T15(3.5,-4.5) T16(4.5,-4.5) T17(5.5,-4.5) T18(6.5,-4.5) T19(7.5,-4.5) T20(8.5,-4.5) T21(9.5,-4.5) T22(10.5,-4.5) U1(-10.5,-5.5) U2(-9.5,-5.5) U3(-8.5,-5.5) U4(-7.5,-5.5) U5(-6.5,-5.5) U6(-5.5,-5.5) U7(-4.5,-5.5) U8(-3.5,-5.5) U9(-2.5,-5.5) U10(-1.5,-5.5) U11(-0.5,-5.5) U12(0.5,-5.5) U13(1.5,-5.5) U14(2.5,-5.5) U15(3.5,-5.5) U16(4.5,-5.5) U17(5.5,-5.5) U18(6.5,-5.5) U19(7.5,-5.5) U20(8.5,-5.5) U21(9.5,-5.5) U22(10.5,-5.5) V1(-10.5,-6.5) V2(-9.5,-6.5) V3(-8.5,-6.5) V4(-7.5,-6.5) V5(-6.5,-6.5) V6(-5.5,-6.5) V7(-4.5,-6.5) V8(-3.5,-6.5) V9(-2.5,-6.5) V10(-1.5,-6.5) V11(-0.5,-6.5) V12(0.5,-6.5) V13(1.5,-6.5) V14(2.5,-6.5) V15(3.5,-6.5) V16(4.5,-6.5) V17(5.5,-6.5) V18(6.5,-6.5) V19(7.5,-6.5) V20(8.5,-6.5) V21(9.5,-6.5) V22(10.5,-6.5) W1(-10.5,-7.5) W2(-9.5,-7.5) W3(-8.5,-7.5) W4(-7.5,-7.5) W5(-6.5,-7.5) W6(-5.5,-7.5) W7(-4.5,-7.5) W8(-3.5,-7.5) W9(-2.5,-7.5) W10(-1.5,-7.5) W11(-0.5,-7.5) W12(0.5,-7.5) W13(1.5,-7.5) W14(2.5,-7.5) W15(3.5,-7.5) W16(4.5,-7.5) W17(5.5,-7.5) W18(6.5,-7.5) W19(7.5,-7.5) W20(8.5,-7.5) W21(9.5,-7.5) W22(10.5,-7.5) Y1(-10.5,-8.5) Y2(-9.5,-8.5) Y3(-8.5,-8.5) Y4(-7.5,-8.5) Y5(-6.5,-8.5) Y6(-5.5,-8.5) Y7(-4.5,-8.5) Y8(-3.5,-8.5) Y9(-2.5,-8.5) Y10(-1.5,-8.5) Y11(-0.5,-8.5) Y12(0.5,-8.5) Y13(1.5,-8.5) Y14(2.5,-8.5) Y15(3.5,-8.5) Y16(4.5,-8.5) Y17(5.5,-8.5) Y18(6.5,-8.5) Y19(7.5,-8.5) Y20(8.5,-8.5) Y21(9.5,-8.5) Y22(10.5,-8.5)
  silkscreen extent -11.8,-11.6 11.6,11.8
IND_LQH3NPN2R2MJRL [mm]
  rect 0.8x2.7 smd mask+0: 1(-1.1,0) 2(1.1,0)
  silkscreen extent -1.5,-1.67 1.5,1.67
LED_0603_1608Metric [mm]
  rrect25% 0.875x0.95 smd mask+0: 1(-0.787,0) 2(0.787,0)
  silkscreen extent -1.49,-0.73 0.8,0.73
logo25mm [mil]
  silkscreen extent -501,-116 502,115
MountingHole_3.2mm_M3_ISO7380_Pad [mm]
  round 5.7 hole 3.2 paste-5.7 mask+0: 1(0,0)
PinHeader_1x02_P2.54mm_Vertical [mm]
  rect 1.7x1.7 hole 1 paste-1.7 mask+0: 1(0,0)
  rrect100% 1.7x1.7 hole 1 paste-1.7 mask+0: 2(0,-2.54)
  silkscreen extent -1.33,-3.87 1.33,1.33
R_0402_1005Metric#1 [mm]
  rrect25% 0.54x0.64 smd mask+0: 1(-0.51,0) 2(0.51,0)
  silkscreen extent -0.15,-0.38 0.15,0.38
R_0402_1005Metric#2 [mm]
  rrect25% 0.54x0.64 smd mask+0: 1(0.51,0) 2(-0.51,0)
  silkscreen extent -0.15,-0.38 0.15,0.38
SAMTEC_TFM-120-02-S-D-A [mm]
  rect 0.74x2.92 smd mask+0: 1(12.065,1.715) 2(12.065,-1.715) 3(10.795,1.715) 4(10.795,-1.715) 5(9.525,1.715) 6(9.525,-1.715) 7(8.255,1.715) 8(8.255,-1.715) 9(6.985,1.715) 10(6.985,-1.715) 11(5.715,1.715) 12(5.715,-1.715) 13(4.445,1.715) 14(4.445,-1.715) 15(3.175,1.715) 16(3.175,-1.715) 17(1.905,1.715) 18(1.905,-1.715) 19(0.635,1.715) 20(0.635,-1.715) 21(-0.635,1.715) 22(-0.635,-1.715) 23(-1.905,1.715) 24(-1.905,-1.715) 25(-3.175,1.715) 26(-3.175,-1.715) 27(-4.445,1.715) 28(-4.445,-1.715) 29(-5.715,1.715) 30(-5.715,-1.715) 31(-6.985,1.715) 32(-6.985,-1.715) 33(-8.255,1.715) 34(-8.255,-1.715) 35(-9.525,1.715) 36(-9.525,-1.715) 37(-10.795,1.715) 38(-10.795,-1.715) 39(-12.065,1.715) 40(-12.065,-1.715)
  round 1.42 hole 1.42 paste-1.42 mask+0: Un1(13.655,0) Un2(-13.655,0)
  silkscreen extent -14.29,-2.86 15.29,2.86
SOT-23-5 [mm]
  rrect25% 1.325x0.6 smd mask+0: 1(-1.138,0.95) 2(-1.138,0) 3(-1.138,-0.95) 4(1.138,-0.95) 5(1.138,0.95)
  silkscreen extent -1.8,-1.56 0.8,1.56
WSON-8-1EP_6x5mm_P1.27mm_EP3.4x4mm [mm]
  rrect25% 0.775x0.5 smd mask+0: 1(-2.662,1.905) 2(-2.662,0.635) 3(-2.662,-0.635) 4(-2.662,-1.905) 5(2.662,-1.905) 6(2.662,-0.635) 7(2.662,0.635) 8(2.662,1.905)
  rect 3.4x4 smd paste-4 mask+0: 9(0,0)
  rrect18% 1.37x1.61 on Top Paste mask-1.61: Un1(-0.85,1) Un2(-0.85,-1) Un3(0.85,1) Un4(0.85,-1)
  silkscreen extent -3,-2.61 3,2.61

## Part data
C1 C3 C5 C7 C8 C9 C10 C11 C12 C13 C25 C26 C27 C28 C35 C36 C37 C38 C39: library part C_0805_2012Metric, "Capacitor SMD 0805 (2012 Metric), square (rectangular) end terminal, IPC_7351 nominal, (Body size source: IPC-SM-782 page 76, https://www.pcb-3d.com/wordpress/wp-content/uploads/ipc-sm-782a_amendment_1_and_2.pdf, https://docs.google.com/spreadsheets/d/1BsfQQcO9C6DZCsRaXUlFlo91Tg2WpOkGARC1WS5S8t0/edit?usp=sharing), generated with kicad-footprint-generator", JLCPCB=C162420, Sheetfile=supply.kicad_sch, Sheetname=supply, ki_description="Unpolarized capacitor, small symbol", ki_keywords="capacitor cap"
C2 C4 C6: library part C_0805_2012Metric, "Capacitor SMD 0805 (2012 Metric), square (rectangular) end terminal, IPC_7351 nominal, (Body size source: IPC-SM-782 page 76, https://www.pcb-3d.com/wordpress/wp-content/uploads/ipc-sm-782a_amendment_1_and_2.pdf, https://docs.google.com/spreadsheets/d/1BsfQQcO9C6DZCsRaXUlFlo91Tg2WpOkGARC1WS5S8t0/edit?usp=sharing), generated with kicad-footprint-generator", JLCPCB=C105505, Sheetfile=supply.kicad_sch, Sheetname=supply, ki_description="Unpolarized capacitor, small symbol", ki_keywords="capacitor cap"
C14 C15 C16 C17 C18 C19 C20 C21 C22 C29 C30 C31 C32 C40 C41 C42 C43 C44 C45 C46: library part C_0402_1005Metric, "Capacitor SMD 0402 (1005 Metric), square (rectangular) end terminal, IPC_7351 nominal, (Body size source: IPC-SM-782 page 76, https://www.pcb-3d.com/wordpress/wp-content/uploads/ipc-sm-782a_amendment_1_and_2.pdf), generated with kicad-footprint-generator", JLCPCB=C106255, Sheetfile=supply.kicad_sch, Sheetname=supply, ki_description="Unpolarized capacitor, small symbol", ki_keywords="capacitor cap"
C23 C24: library part C_1206_3216Metric, "Capacitor SMD 1206 (3216 Metric), square (rectangular) end terminal, IPC_7351 nominal, (Body size source: IPC-SM-782 page 76, https://www.pcb-3d.com/wordpress/wp-content/uploads/ipc-sm-782a_amendment_1_and_2.pdf), generated with kicad-footprint-generator", JLCPCB=C385907, Sheetfile=supply.kicad_sch, Sheetname=supply, ki_description="Unpolarized capacitor, small symbol", ki_keywords="capacitor cap"
C33 C34: library part C_1206_3216Metric, "Capacitor SMD 1206 (3216 Metric), square (rectangular) end terminal, IPC_7351 nominal, (Body size source: IPC-SM-782 page 76, https://www.pcb-3d.com/wordpress/wp-content/uploads/ipc-sm-782a_amendment_1_and_2.pdf), generated with kicad-footprint-generator", JLCPCB=C268006, Sheetfile=supply.kicad_sch, Sheetname=supply, ki_description="Unpolarized capacitor, small symbol", ki_keywords="capacitor cap"
D1: library part LED_0603_1608Metric, "LED SMD 0603 (1608 Metric), square (rectangular) end terminal, IPC_7351 nominal, (Body size source: http://www.tortai-tech.com/upload/download/2011102023233369053.pdf), generated with kicad-footprint-generator", JLCPCB=C89814, Sheetfile=FPGA_bank0_vss.kicad_sch, Sheetname=FPGA_bank0_vss, ki_description="Light emitting diode", ki_keywords="LED diode"
D2 D3 D4 D5: library part LED_0603_1608Metric, "LED SMD 0603 (1608 Metric), square (rectangular) end terminal, IPC_7351 nominal, (Body size source: http://www.tortai-tech.com/upload/download/2011102023233369053.pdf), generated with kicad-footprint-generator", JLCPCB=C601673, ki_description="Light emitting diode", ki_keywords="LED diode"
  D2: Sheetfile=supply.kicad_sch, Sheetname=supply
  D3 D4 D5: Sheetfile=connectors.kicad_sch, Sheetname=connectors
H1 H2 H3 H4: library part MountingHole_3.2mm_M3_ISO7380_Pad, "Mounting Hole 3.2mm, M3, ISO7380", Sheetfile=som_fpga.kicad_sch, ki_description="Mounting Hole with connection", ki_keywords="mounting hole"
J1: library part PinHeader_1x02_P2.54mm_Vertical, "Through hole straight pin header, 1x02, 2.54mm pitch, single row", Sheetfile=FPGA_bank0_vss.kicad_sch, Sheetname=FPGA_bank0_vss, ki_description="Generic connector, single row, 01x02, script generated", ki_keywords=connector
J2 J3 J4: library part SAMTEC_TFM-120-02-S-D-A, Sheetfile=connectors.kicad_sch, Sheetname=connectors, ki_description="Generic connector, double row, 02x20, odd/even pin numbering scheme (row 1 odd numbers, row 2 even numbers), script generated (kicad-library-utils/schlib/autogen/connector/)", ki_keywords=connector
L1 L2 L3: library part IND_LQH3NPN2R2MJRL, JLCPCB=C341775, Sheetfile=supply.kicad_sch, Sheetname=supply, ki_description="Inductor, small symbol", ki_keywords="inductor choke coil reactor magnetic"
R1: library part R_0402_1005Metric, "Resistor SMD 0402 (1005 Metric), square (rectangular) end terminal, IPC_7351 nominal, (Body size source: IPC-SM-782 page 72, https://www.pcb-3d.com/wordpress/wp-content/uploads/ipc-sm-782a_amendment_1_and_2.pdf), generated with kicad-footprint-generator", JLCPCB=C131362, Sheetfile=supply.kicad_sch, Sheetname=supply, ki_description="Resistor, small symbol", ki_keywords="R resistor"
R2 R5: library part R_0402_1005Metric, "Resistor SMD 0402 (1005 Metric), square (rectangular) end terminal, IPC_7351 nominal, (Body size source: IPC-SM-782 page 72, https://www.pcb-3d.com/wordpress/wp-content/uploads/ipc-sm-782a_amendment_1_and_2.pdf), generated with kicad-footprint-generator", JLCPCB=C409681, Sheetfile=supply.kicad_sch, Sheetname=supply, ki_description="Resistor, small symbol", ki_keywords="R resistor"
R3: library part R_0402_1005Metric, "Resistor SMD 0402 (1005 Metric), square (rectangular) end terminal, IPC_7351 nominal, (Body size source: IPC-SM-782 page 72, https://www.pcb-3d.com/wordpress/wp-content/uploads/ipc-sm-782a_amendment_1_and_2.pdf), generated with kicad-footprint-generator", JLCPCB=C323683, Sheetfile=supply.kicad_sch, Sheetname=supply, ki_description="Resistor, small symbol", ki_keywords="R resistor"
R4: library part R_0402_1005Metric, "Resistor SMD 0402 (1005 Metric), square (rectangular) end terminal, IPC_7351 nominal, (Body size source: IPC-SM-782 page 72, https://www.pcb-3d.com/wordpress/wp-content/uploads/ipc-sm-782a_amendment_1_and_2.pdf), generated with kicad-footprint-generator", JLCPCB=C323663, Sheetfile=supply.kicad_sch, Sheetname=supply, ki_description="Resistor, small symbol", ki_keywords="R resistor"
R6: library part R_0402_1005Metric, "Resistor SMD 0402 (1005 Metric), square (rectangular) end terminal, IPC_7351 nominal, (Body size source: IPC-SM-782 page 72, https://www.pcb-3d.com/wordpress/wp-content/uploads/ipc-sm-782a_amendment_1_and_2.pdf), generated with kicad-footprint-generator", JLCPCB=C416388, Sheetfile=supply.kicad_sch, Sheetname=supply, ki_description="Resistor, small symbol", ki_keywords="R resistor"
R7 R8 R9 R10 R15 R16 R17: library part R_0402_1005Metric, "Resistor SMD 0402 (1005 Metric), square (rectangular) end terminal, IPC_7351 nominal, (Body size source: IPC-SM-782 page 72, https://www.pcb-3d.com/wordpress/wp-content/uploads/ipc-sm-782a_amendment_1_and_2.pdf), generated with kicad-footprint-generator", JLCPCB=C3017492, ki_description="Resistor, small symbol", ki_keywords="R resistor"
  R7 R8 R9 R10: Sheetfile=FPGA_bank0_vss.kicad_sch, Sheetname=FPGA_bank0_vss
  R15 R16 R17: Sheetfile=FPGA_bank13_14.kicad_sch, Sheetname=FPGA_bank13_14
R11: library part R_0402_1005Metric, "Resistor SMD 0402 (1005 Metric), square (rectangular) end terminal, IPC_7351 nominal, (Body size source: IPC-SM-782 page 72, https://www.pcb-3d.com/wordpress/wp-content/uploads/ipc-sm-782a_amendment_1_and_2.pdf), generated with kicad-footprint-generator", JLCPCB=C881192, Sheetfile=FPGA_bank0_vss.kicad_sch, Sheetname=FPGA_bank0_vss, ki_description="Resistor, small symbol", ki_keywords="R resistor"
R12 R13 R14 R19: library part R_0402_1005Metric, "Resistor SMD 0402 (1005 Metric), square (rectangular) end terminal, IPC_7351 nominal, (Body size source: IPC-SM-782 page 72, https://www.pcb-3d.com/wordpress/wp-content/uploads/ipc-sm-782a_amendment_1_and_2.pdf), generated with kicad-footprint-generator", JLCPCB=C328298, ki_description="Resistor, small symbol", ki_keywords="R resistor"
  R12 R14 R19: Sheetfile=connectors.kicad_sch, Sheetname=connectors
  R13: Sheetfile=supply.kicad_sch, Sheetname=supply
R18: library part R_0402_1005Metric, "Resistor SMD 0402 (1005 Metric), square (rectangular) end terminal, IPC_7351 nominal, (Body size source: IPC-SM-782 page 72, https://www.pcb-3d.com/wordpress/wp-content/uploads/ipc-sm-782a_amendment_1_and_2.pdf), generated with kicad-footprint-generator", JLCPCB=C471762, Sheetfile=FPGA_bank0_vss.kicad_sch, Sheetname=FPGA_bank0_vss, ki_description="Resistor, small symbol", ki_keywords="R resistor"
U1: library part FB-BGA-484_23.0x23.0mm_Layout22x22_P1.0mm, "Xilinx FB-484, https://www.xilinx.com/support/documentation/user_guides/ug1099-bga-device-design-rules.pdf", Sheetfile=FPGA_bank34_35.kicad_sch, Sheetname=FPGA_bank34_35, ki_description="Artix 7 T 35 XC7A35T-FGG484", ki_keywords=FPGA
U2: library part SOT-23-5, "SOT, 5 Pin (https://www.jedec.org/sites/default/files/docs/Mo-178c.PDF variant AA), generated with kicad-footprint-generator ipc_gullwing_generator.py", JLCPCB=C87122, Sheetfile=supply.kicad_sch, Sheetname=supply, ki_description="1.7MHz, 1A, High Efficiency, Low Ripple, Adjustable Output Voltage Step-down Converter, SOT-23-5", ki_keywords="Step-Down Buck DC-DC Regulator Adjustable"
U3 U4: library part SOT-23-5, "SOT, 5 Pin (https://www.jedec.org/sites/default/files/docs/Mo-178c.PDF variant AA), generated with kicad-footprint-generator ipc_gullwing_generator.py", JLCPCB=C23902, Sheetfile=supply.kicad_sch, Sheetname=supply, ki_description="1.7MHz, 1A, High Efficiency, Low Ripple, Adjustable Output Voltage Step-down Converter, SOT-23-5", ki_keywords="Step-Down Buck DC-DC Regulator Adjustable"
U5: library part WSON-8-1EP_6x5mm_P1.27mm_EP3.4x4mm, "WSON, 8 Pin (http://ww1.microchip.com/downloads/en/AppNotes/S72030.pdf), generated with kicad-footprint-generator ipc_noLead_generator.py", JLCPCB=C2802709, Sheetfile=FPGA_bank13_14.kicad_sch, Sheetname=FPGA_bank13_14, ki_description="32-Mbit, Wide Range Voltage SPI Serial Flash Memory, SOP-8", ki_keywords="SPI 32Mbit 1.65V-3.6V"
U6: library part logo25mm, Sheetfile=som_fpga.kicad_sch
X1: library part Crystal_SMD_3225-4Pin_3.2x2.5mm, "SMD Crystal SERIES SMD3225/4 http://www.txccrystal.com/images/pdf/7m-accuracy.pdf, 3.2x2.5mm^2 package", JLCPCB=C390488, Sheetfile=FPGA_bank15_16.kicad_sch, Sheetname=FPGA_bank15_16, ki_description="CMOS Clock Oscillator 2.5 to 50 MHz", ki_keywords="Crystal Clock Oscillator"

## Via types
v1: diameter 23.62, hole 11.81, F.Cu to B.Cu, tented both sides, 250 vias

## Nets (pads, with @x,y where several pads share a name; then routed paths per layer and width w, separated by ;. In a path a pad name is that pad's centre, name@x,y a point inside that pad or via, vN(x,y) a via of type N, cw(c..) or ccw(c..) an arc to the next point about the centre after c; other vN are vias at no path point)
+1V0: C6.1 C33.1 C34.1 C35.1 C36.1 C37.1 C38.1 C39.1 C40.1 C41.1 C42.1 C43.1 L3.2 R5.1 U1.H8 U1.H10 U1.J7 U1.J9 U1.J11 U1.K8 U1.L7 U1.L11 U1.M8 U1.N7 U1.N11 U1.P8 U1.P10 U1.R7 U1.R9 U1.T8 U1.T10 | length 1033.9
  F.Cu w5: U1.T10@5410.63,1237.4 U1.R9@5450,1276.77 ; U1.T8@5410.63,1316.14 v1(5423.42,1303.36) U1.R9@5450,1276.77 ; U1.R7@5450,1355.51 5450,1356.41 v1(5461.15,1367.56) ; U1.P8@5489.37,1316.14 5495.5,1316.14 v1(5499.51,1320.15) ; U1.N7@5528.74,1355.51 v1(5541.52,1368.31)
  F.Cu w7.87: L3.2@4452.52,1248.46 4503.7,1248.46 C6.1@4572.6,1317.36 4612.95,1277.01 4709.02,1277.01 R5.1@4716.3,1284.29 4717.68,1282.91 C33.1@4837.85,1282.91 ; C33.1@4837.85,1287.85 C33.1@4837.85,1282.91 ; v1(4854.09,1239.21) 4837.85,1255.45 C33.1@4837.85,1282.91 ; U1.P10@5489.37,1237.4 5489.37,1237.8 v1(5501.39,1249.82) ; v1(5525.98,1205.12) 5528.74,1202.36 U1.N11@5528.74,1198.03 ; U1.M8@5568.11,1316.14 5568.5,1316.14 v1(5573.23,1311.42) ; U1.L7@5607.48,1355.51 v1(5620.26,1368.3) ; U1.K8@5646.85,1316.14 5649.21,1316.14 v1(5651.18,1314.17) 5686.22,1279.13 U1.J9@5686.22,1276.77 ; v1(5673.44,1210.82) U1.J11@5686.22,1198.03 ; v1(5678.56,1344.62) 5686.22,1352.28 U1.J7@5686.22,1355.51 ; U1.H8@5720.47,1316.14 U1.H8@5725.59,1316.14 ; v1(5720.87,1231.1) 5725.59,1235.83 U1.H10@5725.59,1237.4
  B.Cu w7.87: C39.1@5290.55,1451.57 5291.54,1451.57 5423.42,1319.7 v1(5423.42,1303.36) ; C43.1@5704.33,1332.28 5714.3,1332.28 v1(5727.89,1318.69)
  other v1: 5607.21,1198.74 4889.76,1292.52 4912.6,1318.9 4795.28,1335.83 4830.71,1335.83 4866.14,1335.83
+1V8: C4.1 C24.1 C25.1 C26.1 C27.1 C28.1 C29.1 C30.1 C31.1 C32.1 L2.2 R4.1 U1.E12 U1.H12 U1.K10 U1.K12 U1.M12 U1.P12 U1.R11 U2.1 | length 2891.6
  F.Cu w5: U1.P12@5489.37,1158.66 5509.06,1178.35 5548.43,1178.35 U1.M12@5568.11,1158.66 U1.M12@5568.97,1158.66 ; v1(5634.07,1250.19) U1.K10@5646.85,1237.4 ; v1(5711.02,1170.87) 5713.39,1170.87 U1.H12@5725.59,1158.66 ; v1(5828.58,1171.72) 5841.63,1158.66 U1.E12@5843.7,1158.66
  F.Cu w7.87: L2.2@4457.44,938.43 4502.72,938.43 C4.1@4573.58,1009.29 ; U2.1@4579.25,1554.96 U2.1@4565.51,1554.96 4551.78,1554.96 4525.56,1528.74 4397.64,1528.74 4366.14,1497.24 4366.14,1091.73 4448.58,1009.29 C4.1@4573.58,1009.29 ; C24.1@4842.78,986.65 4732.44,986.65 R4.1@4721.22,997.87 4692.28,968.94 4613.94,968.94 C4.1@4573.58,1009.29 ; v1(5011.42,1027.56) 4953.54,969.69 4953.54,832.62 4989.12,797.05 5026.63,797.05 5074.41,844.83 v1(5074.41,1017.32) ; U1.R11@5450,1198.03 5450,1196.85 v1(5456.69,1190.16) 5472.83,1174.02 5472.83,1171.65 5485.83,1158.66 U1.P12@5489.37,1158.66 ; v1@5634.07,1171.44 U1.K12@5646.85,1158.66
  B.Cu w5: v1(5634.07,1171.45) v1(5634.07,1250.19) ; C28.1@5705.51,1527.56 5720.08,1512.99 5787.4,1512.99 5796.2,1504.19 5796.2,1473.09 5796.06,1472.96 5796.06,1366.54 5818.44,1344.15 5825.93,1344.15 5825.93,1281.83 C26.1@5787.01,1242.91 5787.01,1213.29 v1(5828.58,1171.72)
  B.Cu w7.87: v1(5456.69,1190.16) 5477.62,1190.16 5516.2,1228.74 5535.77,1228.74 5549.61,1214.9 5549.61,1210.83 5590.76,1169.69 C31.1@5622.83,1169.68 5632.3,1169.69 v1(5634.07,1171.45)
  other v1: 4913.39,1005.12 4960.63,1005.12
+3V3: C2.1 C7.1 C8.1 C9.1 C10.1 C11.1 C12.1 C13.1 C14.1 C15.1 C16.1 C17.1 C18.1 C19.1 C20.1 C21.1 C22.1 C23.1 J1.1 J2.12 J2.39 J2.40 J3.39 J3.40 J4.39 J4.40 L1.2 R1.1 R7.2 R9.2 R10.2 R11.2 R15.1 R16.1 R17.1 U1.A17 U1.AA7 U1.AA17 U1.AB4 U1.AB14 U1.B14 U1.C1 U1.C21 U1.D18 U1.E15 U1.F2 U1.F12 U1.F22 U1.G19 U1.H6 U1.H16 U1.J3 U1.J13 U1.K20 U1.L17 U1.M4 U1.M14 U1.N1 U1.N21 U1.P18 U1.R5 U1.R15 U1.T2 U1.T12 U1.T22 U1.U11 U1.U19 U1.V6 U1.V16 U1.W3 U1.W13 U1.Y10 U1.Y20 U5.8 X1.1 X1.4 | length 4719.9
  F.Cu w5: v1(5165.35,1477.56) 5169.29,1473.62 U1.AB4@5174.41,1473.62 ; 5265.75,1223.62 5273.09,1216.28 ; v1(5283.46,1520.87) 5291.34,1512.99 U1.W3@5292.52,1512.99 ; 5358.46,1185.25 5371.25,1198.03 5377.95,1198.03 v1(5405.51,1170.47) 5405.51,1163.78 U1.T12@5410.63,1158.66 ; U1.T2@5410.63,1552.36 5413.39,1552.36 v1(5417.32,1556.3) ; v1(5439.37,1033.88) 5446.05,1040.55 U1.R15@5450,1040.55 ; U1.R5@5450,1434.25 5468.25,1452.5 5546.99,1452.5 U1.M4@5568.11,1473.62 5568.11,1476.58 v1(5579.41,1487.88) ; v1(5675.66,1499.06) 5675.66,1502.43 U1.J3@5686.22,1512.99 ; v1(5720.47,1398.82) 5724.41,1394.88 U1.H6@5725.59,1394.88 ; v1(5803.54,697.64) 5804.33,698.43 U1.F22@5804.33,764.96 U1.F22@5804.76,764.96 ; v1(5905.91,820.87) U1.C21@5922.44,804.33 ; U1.A17@6001.18,961.81 6040.83,961.81 v1(6043.31,964.29) ; X1.4@6163.39,875.2 X1.1@6230.31,875.2 ; C18.1@6183.86,1164.57 6183.86,1208.66 R11.2@6185.04,1209.84 v1(6196.85,1209.84) ; v1(6220.47,843.7) 6230.31,853.54 X1.1@6230.31,875.2 ; C15.1@6295.28,926.38 6281.5,926.38 X1.1@6230.31,875.2
  F.Cu w7.87: L1.2@4452.81,1560.87 4498.09,1560.87 C2.1@4572.89,1635.67 4613.25,1676.02 4752.52,1676.02 ; R1.1@4718.07,1634.09 4718.07,1641.57 4752.52,1676.02 ; C23.1@4842.58,1626.81 4793.37,1676.02 4752.52,1676.02 ; v1(4882.44,1583.11) v1@4882.44,1586.95 ; v1(5165.35,1072.05) 5173.23,1079.92 U1.AB14@5174.41,1079.92 ; v1(5204.72,969.69) 5212.6,961.81 U1.AA17@5213.78,961.81 ; U1.AA7@5213.78,1355.51 5213.78,1355.91 v1(5216.14,1358.27) 5233.07,1375.2 5312.2,1375.2 U1.V6@5331.89,1394.88 ; U1.Y20@5253.15,843.7 5255.91,843.7 v1(5263.78,851.57) ; U1.Y10@5253.15,1237.4 5253.15,1236.22 v1(5255.91,1233.46) 5265.75,1223.62 5272.83,1216.54 5272.83,1138.98 U1.W13@5292.52,1119.29 5292.13,1119.29 U1.W13@5288.19,1115.35 ; v1(5292.52,551.57) 5293.31,552.36 C17.1@5293.31,568.5 ; U1.V16@5331.89,1001.18 5350.59,982.48 v1(5350.59,982.03) ; U5.8@5358.66,649.21 5358.66,690.55 v1(5409.45,741.34) 5410.63,742.52 U1.T22@5410.63,764.96 ; U1.U19@5371.26,883.07 5374.02,883.07 v1(5377.95,887.01) ; U1.P18@5489.37,922.02 U1.P18@5489.37,922.44 5502.4,909.41 v1(5504.48,909.41) ; v1(5523.62,808.27) 5527.56,804.33 U1.N21@5528.74,804.33 ; v1(5527.95,1612.2) 5528.74,1611.42 U1.N1@5528.74,1591.73 ; U1.M14@5568.11,1079.92 5570.08,1079.92 v1(5575.98,1074.02) ; U1.L17@5607.48,961.81 v1(5620.26,974.6) ; U1.K20@5646.85,843.7 5646.85,842.08 5664.91,824.02 5705.12,824.02 v1@5705.51,824.41 ; U1.J13@5686.22,1119.29 5704.64,1100.87 v1(5704.64,1100.39) ; v1(5719.29,992.91) 5725.59,999.21 U1.H16@5725.59,1001.18 ; U1.G19@5764.96,883.07 5767.72,883.07 v1(5771.65,879.13) ; v1(5791.55,1145.87) U1.F12@5804.33,1158.65 ; v1(5795.67,1561.81) 5795.67,1561.02 U1.F2@5804.33,1552.36 ; U1.E15@5843.7,1040.55 5843.7,1040.94 v1(5851.97,1049.21) ; v1@5909.66,1578.95 U1.C1@5922.44,1591.73 ; v1(6604.53,1566.63) 6662.6,1508.56 6662.6,923.62 v1(6606.69,867.72)
  F.Cu w15.75: C23.1@4842.58,1626.81 v1@4882.44,1586.95
  B.Cu w5: v1(5439.37,1033.88) C9.1@5513.39,959.87 ; v1(5994.09,1747.24) 6003.64,1756.79 J3.40@6003.64,1835.63 J3.39@6003.64,1970.67
  B.Cu w7.87: J4.39@5053.64,192.91 5053.64,327.95 v1(5053.64,401.28) ; C20.1@5177.17,992.13 5199.61,969.69 v1(5204.72,969.69) ; C8.1@5184.65,1118.11 5184.65,1091.34 v1(5165.35,1072.05) 5279.92,1186.61 R9.2@5351.57,1186.61 ; v1(5350.59,982.03) 5351.18,981.44 C12.1@5351.18,961.42 ; v1(5376.38,630.98) 5381.1,626.26 R15.1@5381.1,584.25 5421.26,544.09 R17.1@5430.71,544.09 5470.47,583.86 R16.1@5479.92,583.86 C21.1@5525.59,583.86 ; R7.2@5381.89,1284.25 5381.89,1216.93 R9.2@5351.57,1186.61 ; v1(5405.51,1170.47) 5389.37,1186.61 R9.2@5351.57,1186.61 ; v1(5439.37,1033.88) 5471.64,1066.14 5488.98,1066.14 R10.2@5553.15,1130.32 ; C9.1@5513.39,959.84 C9.1@5513.78,959.45 ; v1(5791.55,1145.87) 5791.55,1109.63 v1(5851.97,1049.21) ; v1(5883.07,922.44) 5901.97,941.34 C14.1@5904.72,941.34 ; C19.1@5898.82,1575.59 5906.29,1575.59 v1(5909.65,1578.95) 5948.05,1540.55 C13.1@5959.84,1540.55 ; v1(5994.09,1747.24) 6049.21,1692.13 C11.1@6049.21,1680.32 ; J2.39@6415.35,1576.38 6425.1,1566.63 J2.39@6469.49,1566.63 v1(6604.53,1566.63) ; J2.12@6604.53,866.63 6605.61,866.63 v1(6606.69,867.72)
  other v1: 5705.91,824.41 5964.96,1090.94 5055.12,1264.96 5110.24,1264.96 5066.93,1383.07 5098.43,1383.07 5055.12,1446.06 5055.12,1477.56 5055.12,1509.06 5055.12,1540.55 5055.12,1572.05 6445.67,1579.92
+5V: C1.1 C3.1 C5.1 J2.1 J2.2 J3.1 J3.2 J4.1 J4.2 R13.1 U2.4 U3.1 U3.4 U4.1 U4.4 | length 4194.4
  F.Cu w5: R13.1@4468.41,524.8 4472.34,520.87 v1(4496.06,520.87)
  F.Cu w7.87: R13.1@4468.41,524.8 4472.29,524.8 4652.32,704.84 C3.1@4652.32,780.94 ; U4.1@4565.22,1242.56 4579.98,1242.56 U4.4@4654.78,1167.76 4649.37,1162.34 C5.1@4649.37,1092.95 4653.9,1092.95 v1(4669.06,1077.8) ; U3.1@4570.14,932.52 4585.98,932.52 4659.7,858.8 U3.4@4659.7,857.72 4652.32,850.33 C3.1@4652.32,780.94 ; U2.4@4655.08,1480.16 4647.7,1472.78 C1.1@4647.7,1399.45 4676.34,1399.45 v1(4677.72,1398.07) ; v1(4677.91,793.35) 4665.51,780.94 C3.1@4652.32,780.94
  B.Cu w5: v1(4496.06,520.87) 4496.06,505.12 4879.07,122.11 5101.24,122.11 5955.12,122.11 5966.85,110.37 6003.64,147.17 J4.2@6003.64,325 J4.1@6003.64,189.96
  B.Cu w7.87: v1(5000,1806.3) 5029.33,1835.63 J3.2@5053.64,1835.63 J3.1@5053.64,1970.67 ; J4.2@6003.64,325 6003.64,258.28 6091.82,346.46 6296.46,346.46 6401.97,451.97 6570.47,451.97 6625.59,507.09 6625.59,595.57 J2.2@6604.53,616.63 J2.1@6469.49,616.63
CONN1.1_N: J3.7 U1.AB6 | length 666.1
  F.Cu w5.25: U1.AB6@5174.41,1394.88 5153.6,1394.88 5094.75,1453.73 5094.75,1829.96 5185.2,1920.41 5185.2,1952.23 v1(5203.64,1970.67)